# Altium PCB LANModule.PcbDoc
Units mm, origin at the board's own origin, x right, y up, seen from the top; angles counter-clockwise.
Board outline 82.35 x 57.25 mm, 2 copper layers (Top Layer, Bottom Layer), stack 1.671 mm thick; 19 components, 23 nets, 161 pads, 55 vias.
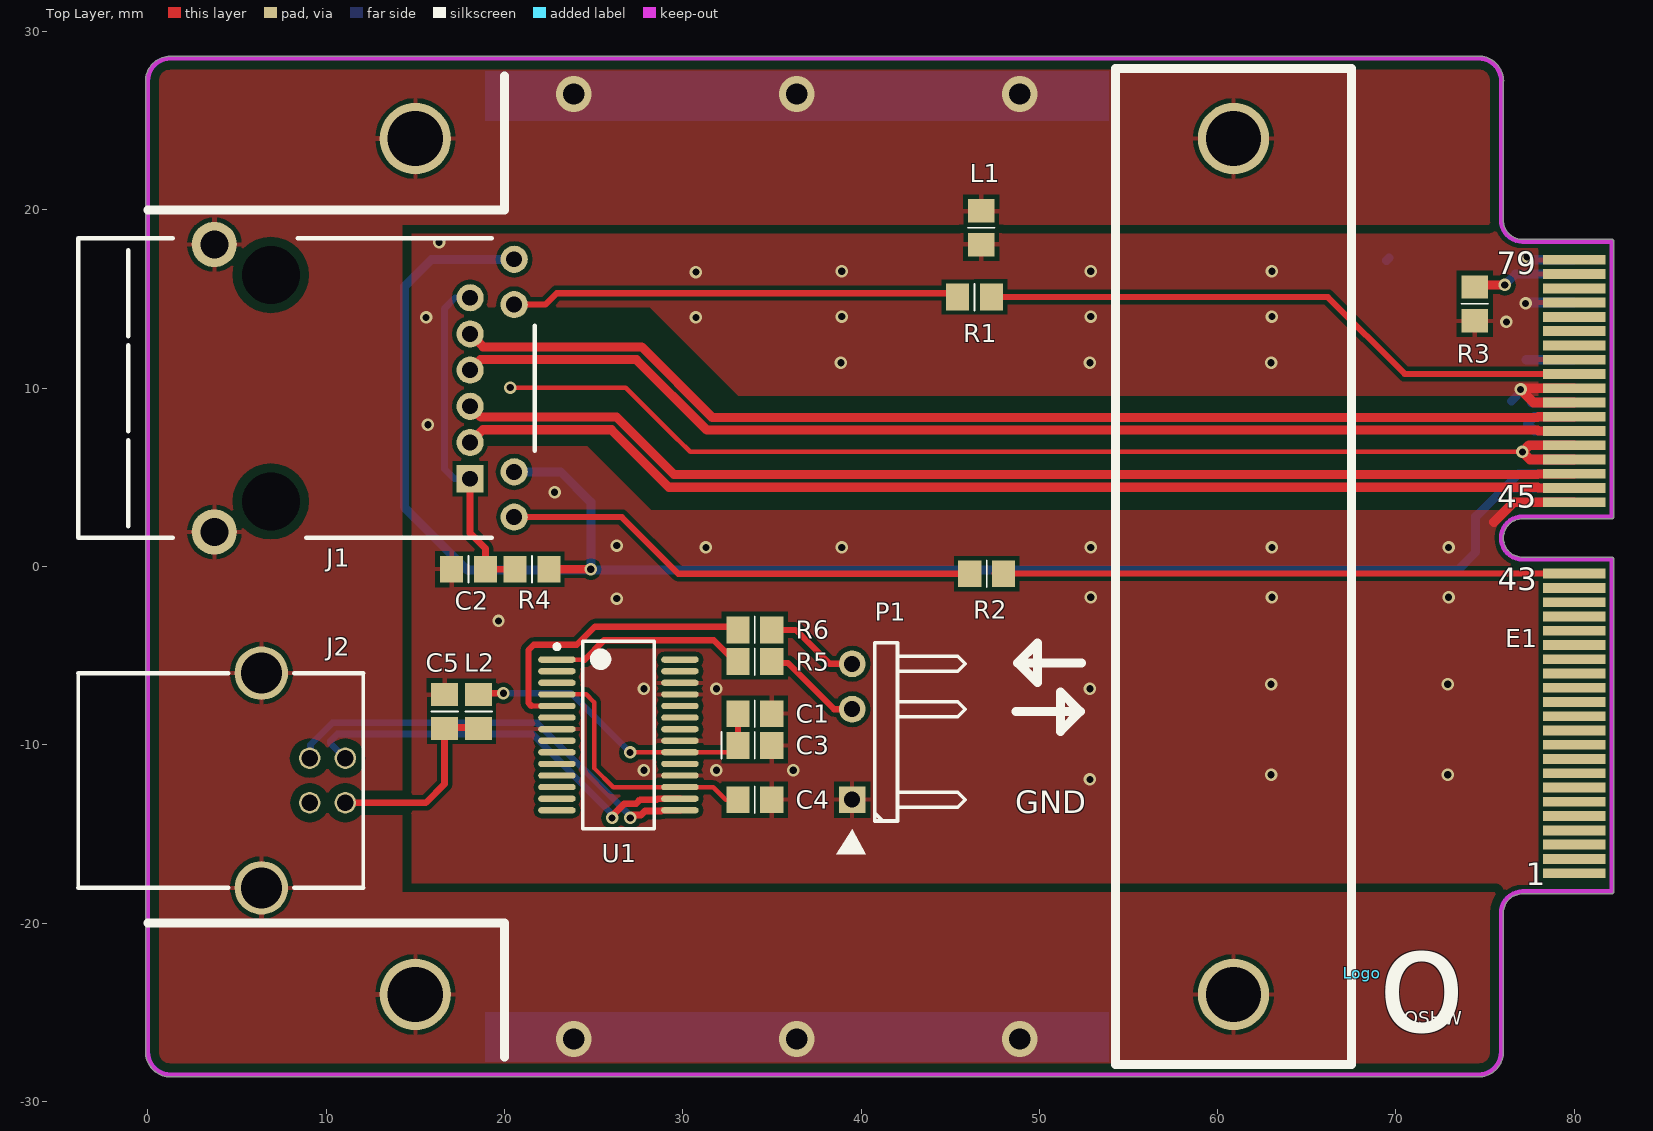
[diagram p0: Top Layer view]
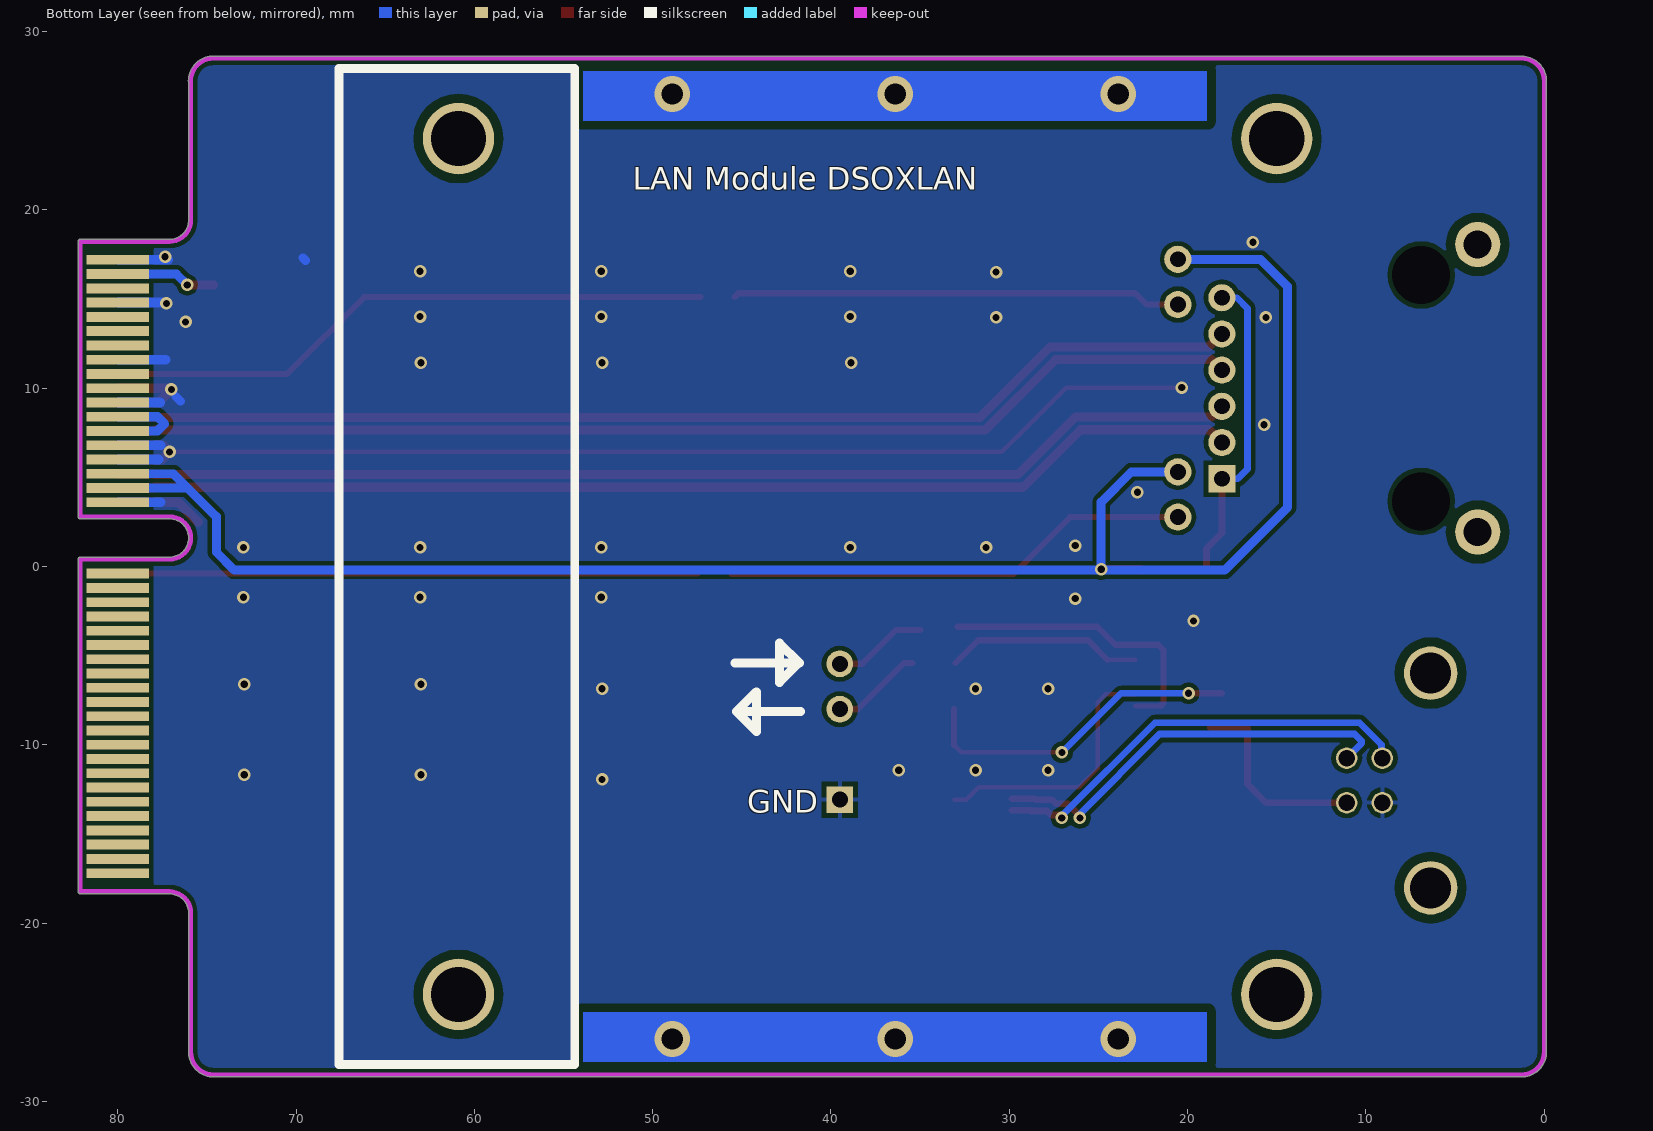
[diagram p1: Bottom Layer view, seen from below]
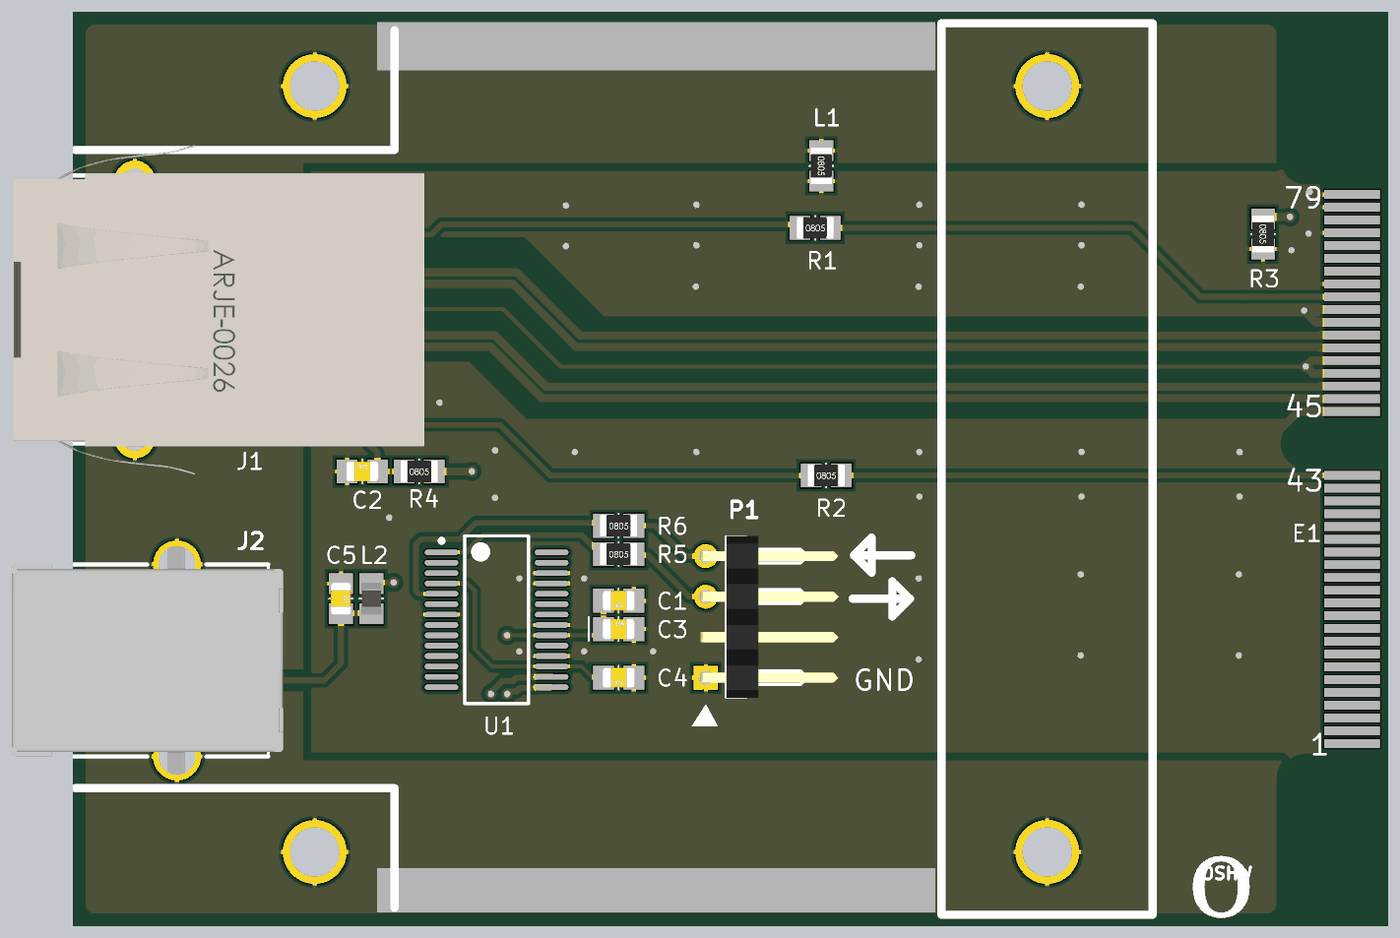
[diagram p2: 3D render of the assembled board from above, using the file's embedded part models]

## Layer stack, top to bottom
Top Solder: solder mask 0.0102, Solder Resist, Dk 3.5
Top Layer: signal copper 0.0356
Dielectric1: core 1.6, FR-4, Dk 4.8
Bottom Layer: signal copper 0.0356
Bottom Solder: solder mask 0.0102, Solder Resist, Dk 3.5

## Board outline
1.27,-28.627 74.632,-28.627 ccw(c74.632,-27.23) 76.015,-27.431 ccw(c75.9,-27.377) 76.027,-27.377 76.027,-27.311 ccw(c74.632,-27.23) 76.03,-27.23 ccw(c75.902,-27.23) 76.027,-27.205 76.027,-19.437 ccw(c75.9,-19.437) 76.024,-19.408 cw(c77.096,-19.437) 77.096,-18.364 ccw(c77.096,-18.237) 77.151,-18.352 82.1,-18.352 ccw(c82.1,-18.225) 82.227,-18.225 82.227,0.4 ccw(c82.1,0.4) 82.1,0.528 77.1,0.528 cw(c77.1,1.6) 77.099,2.673 cw(c77.1,1.6) 77.1,2.673 82.1,2.673 ccw(c82.1,2.8) 82.227,2.8 82.227,18.225 ccw(c82.1,18.225) 82.1,18.353 77.1,18.353 cw(c77.1,19.425) 76.027,19.425 76.027,27.18 ccw(c75.911,27.23) 76.038,27.23 ccw(c74.641,27.23) 74.641,28.628 ccw(c74.641,28.5) 74.637,28.628 ccw(c74.632,28.5) 74.632,28.628 1.27,28.628 ccw(c1.27,28.5) 1.253,28.627 ccw(c1.27,27.229) -0.127,27.229 -0.127,-27.23 ccw(c1.27,-27.23)

## Design rules (kind name [scope] priority, off if disabled: settings)
Clearance Clearance_EARTH [InNet('EARTH')] p1: gap=0.5
Clearance Clearance_Poly [All vs Inpoly] p2: gap=0.254
Clearance [All] p3: gap=0.127
DiffPairsRouting DiffPair_DiffPairsRouting [InDifferentialPair ('TXD') Or InDifferentialPair ('RXD')] p1: maxlimit=0.203 minlimit=0.203 mostfreqgap=0.203 toplayer_minwidth=0.508 toplayer_maxwidth=0.508 toplayer_prefwidth=0.508 bottomlayer_minwidth=0.508 bottomlayer_maxwidth=0.508 bottomlayer_prefwidth=0.508 maxuncoupledlength=12.7
DiffPairsRouting [All] p2: maxlimit=0.254 minlimit=0.254 mostfreqgap=0.254 toplayer_minwidth=0.381 toplayer_maxwidth=0.381 toplayer_prefwidth=0.381 bottomlayer_minwidth=0.381 bottomlayer_maxwidth=0.381 bottomlayer_prefwidth=0.381 maxuncoupledlength=12.7
HoleSize [All] p1: absolutevalues=TRUE maxlimit=4 minlimit=0.025 maxpercent=80.000 minpercent=20.000
MatchedLengths DiffPair_MatchedLengths [InDifferentialPair ('TXD') Or InDifferentialPair ('RXD')] p1: tolerance=5 checknetsindiffpair=TRUE checkdiffpairvsdiffpair=FALSE checkxsignals=FALSE checkothers=FALSE
MatchedLengths DiffPair_MatchedLengths_1 [InDifferentialPair ('RXD') Or InDifferentialPair ('TXD')] p2: tolerance=25.4 checknetsindiffpair=TRUE checkdiffpairvsdiffpair=FALSE checkxsignals=FALSE checkothers=FALSE
MatchedLengths DiffPair_MatchedLengths_2 [InDifferentialPair ('TXD') Or InDifferentialPair ('RXD')] p3: tolerance=25.4 checknetsindiffpair=TRUE checkdiffpairvsdiffpair=FALSE checkxsignals=FALSE checkothers=FALSE
MinimumSolderMaskSliver [All] p1: minsoldermaskwidth=0.025
PolygonConnect PolygonConnect_1 [All vs isVia] p1: connectstyle=Direct reliefconductorwidth=0.254 reliefentries=4 polygonreliefangle="90 Angle" airgapwidth=0.254
PolygonConnect [All] p2: connectstyle=Relief reliefconductorwidth=0.254 reliefentries=4 polygonreliefangle="90 Angle" airgapwidth=0.254
RoomDefinition LANModule [InComponentClass('LANModule')] p1: confinementstyle=ConfineIn formatcopy=TRUE lockcomponents=FALSE outline -5.205,-30.063 84.396,-30.063 84.396,30.237 -5.205,30.237
RoutingVias [All] p1: holewidth=0.711 width=1.27 viastyle="Through Hole" minholewidth=0.711 minwidth=1.27 maxholewidth=0.711 maxwidth=1.27
SilkToSolderMaskClearance SilkscreenOverComponentPads [IsPad] p1: minsilkscreentomaskgap=0.127 clearancetoexposedcopper=TRUE
SolderMaskExpansion [All] p1: expansion=0.102
Width DiffPair_Width [InDifferentialPair('TXD') Or InDifferentialPair('RXD')] p1: maxlimit=0.254 minlimit=0.254 preferedwidth=0.254 impedancedriven=TRUE minimp=50.000000 maximp=50.000000 favimp=50.000000
Width [All] p2: maxlimit=1.016 minlimit=0.254 preferedwidth=0.508
26 further rules are at their usual default settings.

## Classes and differential pairs
component class LANModule: C1 C2 C3 C4 C5 E1 J1 J2 L1 L2 Logo P1 R1 R2 R3 R4 R5 R6
differential pair RXD: +RXD_P -RXD_N
differential pair TXD: +TXD_P -TXD_N
differential pair D: +D_P -D_N

## Components (designator, comment, footprint, x,y, rotation, side; value= is the part's Value field where it differs from the comment)
C1 "10nF" CCNP2012-0805 34.043,-8.255 r180 top
C2 "1uF" CCNP2012-0805 17.986,-0.152 r0 top
C3 "4u7F" CC2012-0805 34.043,-10.033 r0 top
C4 "100nF" CCNP2012-0805 34.043,-13.081 r180 top
C5 "10nF" CCNP2012-0805 16.644,-8.128 r270 top
E1 "DSO_LAN" DSO_LAN 80,0 r0 top locked
J1 "RJMG1-6312-81-01NR" "MAGJACK - AMPHENOL RJMG16" 6.896,10 r0 top
J2 "USB Type A Plug" USB_BCon 8.722,-12 r0 top
L1 "FB" CR2012-0805 46.743,19 r270 top
L2 "Ferrite Bead" FB2012-0805 18.549,-8.128 r90 top
Logo "OSHW Logo" OSHW 68.126,-22.809 r0 top
P1 "Header 1x4H" HDR1X4H 39.504,-13.081 r90 top
R1 "470R" CR2012-0805 46.362,15.113 r0 top
R2 "470R" CR2012-0805 47.048,-0.4 r0 top
R3 "0R" CR2012-0805 74.422,14.732 r270 top
R4 "10R" CR2012-0805 21.542,-0.152 r0 top
R5 "1K" CR2012-0805 34.043,-5.334 r0 top
R6 "1K" CR2012-0805 34.043,-3.556 r0 top
U1 "FT232RL-Reel" SSOP-28_N 26.393,-9.448 r0 top

## Footprints (in the part's own frame and the unit in brackets; to place one, negate y for a bottom-side part, rotate by r counter-clockwise, add the part's x,y. Pads: shape width x height; smd on the part's side, far side on the other; paste and mask are expansions set on the pad)
CC2012-0805 [mm]
  rect 1.3x1.5 smd: 1(-0.95,0) 2(0.95,0)
  silkscreen extent -1.87,-0.75 0,0.75, body extent -1,-0.62 1,0.63, height 0.78
CCNP2012-0805 [mm]
  rect 1.3x1.5 smd: 1(-0.95,0) 2(0.95,0)
  silkscreen extent 0,-0.75 0,0.75, body extent -1,-0.62 1,0.63, height 0.78
CR2012-0805 [mm]
  rect 1.3x1.5 smd: 1(-0.95,0) 2(0.95,0)
  silkscreen extent 0,-0.75 0,0.75, body extent -1.15,-0.67 1.15,0.68, height 0.76
DSO_LAN [mm]
  rect 3.5x0.55 smd: 1(0,-17.2) 3(0,-16.4) 5(0,-15.6) 7(0,-14.8) 9(0,-14) 11(0,-13.2) 13(0,-12.4) 15(0,-11.6) 17(0,-10.8) 19(0,-10) 21(0,-9.2) 23(0,-8.4) 25(0,-7.6) 27(0,-6.8) 29(0,-6) 31(0,-5.2) 33(0,-4.4) 35(0,-3.6) 37(0,-2.8) 39(0,-2) 41(0,-1.2) 43(0,-0.4) 45(0,3.6) 47(0,4.4) 49(0,5.2) 51(0,6) 53(0,6.8) 55(0,7.6) 57(0,8.4) 59(0,9.2) 61(0,10) 63(0,10.8) 65(0,11.6) 67(0,12.4) 69(0,13.2) 71(0,14) 73(0,14.8) 75(0,15.6) 77(0,16.4) 79(0,17.2)
  rect 3.5x0.55 smd far side: 2(0,-17.2) 4(0,-16.4) 6(0,-15.6) 8(0,-14.8) 10(0,-14) 12(0,-13.2) 14(0,-12.4) 16(0,-11.6) 18(0,-10.8) 20(0,-10) 22(0,-9.2) 24(0,-8.4) 26(0,-7.6) 28(0,-6.8) 30(0,-6) 32(0,-5.2) 34(0,-4.4) 36(0,-3.6) 38(0,-2.8) 40(0,-2) 42(0,-1.2) 44(0,-0.4) 46(0,3.6) 48(0,4.4) 50(0,5.2) 52(0,6) 54(0,6.8) 56(0,7.6) 58(0,8.4) 60(0,9.2) 62(0,10) 64(0,10.8) 66(0,11.6) 68(0,12.4) 70(0,13.2) 72(0,14) 74(0,14.8) 76(0,15.6) 78(0,16.4) 80(0,17.2)
  Keep-Out Layer lines w0.254: -78.73,28.499 ccw(c-78.73,27.229) -80,27.229 -80,-27.23 ccw(c-78.73,-27.23) -78.73,-28.5 -5.368,-28.5 ccw(c-5.368,-27.23) -4.098,-27.23 ; -78.73,28.5 -5.368,28.5 ; -5.359,28.5 cw(c-5.359,27.23) -4.089,27.23 ; -4.104,-19.437 cw(c-2.904,-19.437) -2.904,-18.237 ; -4.1,-27.377 -4.1,-19.437 ; -4.1,27.229 -4.1,19.425 ccw(c-2.9,19.425) -2.9,18.225 2.1,18.225 2.1,2.8 -2.9,2.8 ccw(c-2.9,1.6) -2.9,0.4 2.1,0.4 2.1,-18.225 -2.904,-18.225
FB2012-0805 [mm] "Ferrite Bead 0805"
  rect 1.3x1.5 smd: 1(-0.95,0) 2(0.95,0)
  silkscreen extent 0,-0.75 0,0.75, body extent -1,-0.62 1,0.63, height 0.85
HDR1X4H [mm] "Connector; Header; 4 Position; Right Angle"
  rect 1.5x1.5 hole 0.9: 1(0,0)
  round 1.5 hole 0.9: 3(5.08,0) 4(7.62,0)
  silkscreen extent -3.05,-6.35 8.81,0.89, body extent -1.27,-8.3 8.89,0.33, height 2.54
"MAGJACK - AMPHENOL RJMG16" [mm] "RJ45 Jack with Magnetics"
  round 2.54 hole 3.25: 0(0,-6.35) 0(0,6.35)
  rect 1.524x1.524 hole 0.89: 1(11.18,-5.075)
  round 1.524 hole 0.89: 2(11.18,-3.045) 3(11.18,-1.015) 4(11.18,1.015) 5(11.18,3.045) 6(11.18,5.075) G-A(13.65,7.23) G-K(13.65,4.69) Y-A(13.65,-4.69) Y-K(13.65,-7.23)
  round 2.54 hole 1.575: S1(-3.17,8.065) S2(-3.17,-8.065)
  silkscreen extent -10.79,-8.4 14.8,8.4, body extent -10.79,-10.36 14.99,10.31, height 16.16
OSHW [mm] "OSHW Logo"
SSOP-28_N [mm] "SOP, 28-Leads, Body 10.2x5.3mm, Pitch 0.65mm, IPC Medium Density"
  oval 2.1x0.35 smd: 1(-3.45,4.225) 2(-3.45,3.575) 3(-3.45,2.925) 4(-3.45,2.275) 5(-3.45,1.625) 6(-3.45,0.975) 7(-3.45,0.325) 8(-3.45,-0.325) 9(-3.45,-0.975) 10(-3.45,-1.625) 11(-3.45,-2.275) 12(-3.45,-2.925) 13(-3.45,-3.575) 14(-3.45,-4.225) 15(3.45,-4.225) 16(3.45,-3.575) 17(3.45,-2.925) 18(3.45,-2.275) 19(3.45,-1.625) 20(3.45,-0.975) 21(3.45,-0.325) 22(3.45,0.325) 23(3.45,0.975) 24(3.45,1.625) 25(3.45,2.275) 26(3.45,2.925) 27(3.45,3.575) 28(3.45,4.225)
  silkscreen extent -3.57,-5.25 2,5.25, body extent -2.8,-5.25 2.8,5.25, height 2
USB_BCon [mm] "USB B-type Connector"
  round 1.2 hole 0.92: 5V(2.355,-1.25) D+(0.355,1.25) D-(2.355,1.25) Gnd(0.355,-1.25)
  round 3 hole 2.3: Shield1(-2.355,6.02) Shield2(-2.355,-6.02)
  silkscreen extent -12.63,-6.02 3.37,6.02, body extent -12.7,-7.43 4.3,7.43, height 11

## Part data
C1 C2 C4 C5: library part Cap, "Capacitor"
C3: library part "Cap Polar", "Polarized Capacitor"
J1: library part MagJack-RJMG1-6312-81-01NR, "RJ45 Jack with Magnetics (Amphenol)"
J2: library part USB_TYPE_A_PLUG, "MOLEX 48037-1000"
L1: library part "Ferrite Bead 0805", "Ferrite Bead (0805) 0.045OHM, 2A"
L2: library part "Ferrite Bead 0805", "Ferrite Bead SMT 0805, TDK MPZ2012S102AT, 0.15OHM, 1.5A"
P1: "Header, 4-Pin, Right Angle"
R1 R2 R3 R4: library part Res_CR0805, "Resistor"
R5 R6: library part Res, "Resistor"
U1: "USB UART Asynchronous Serial Data Transfer Chip, SSOP-28, Tape and Reel"

## Free pads (board coordinates)
  round 4 hole 3.1: 0(15,24) 1(60.896,24) 2(60.896,-24) 3(15,-24)

## Via types
v1: diameter 0.7, hole 0.4, Top Layer to Bottom Layer, tented both sides, 49 vias
v2: diameter 2, hole 1.2, Top Layer to Bottom Layer, tented both sides, 6 vias

## Nets (pads, with @x,y where several pads share a name; then routed paths per layer and width w, separated by ;. In a path a pad name is that pad's centre, name@x,y a point inside that pad or via, vN(x,y) a via of type N, cw(c..) or ccw(c..) an arc to the next point about the centre after c; other vN are vias at no path point)
3V3: E1.48 E1.50 J1.G-A J1.Y-A R4.2 | length 104.6
  Top Layer w0.5: R4.2@22.548,-0.2 22.596,-0.152 v1(24.844,-0.152)
  Bottom Layer w0.5: J1.Y-A 23.145,5.31 24.844,3.612 v1(24.844,-0.152) ; J1.G-A 15.916,17.23 14.384,15.698 14.384,3.328 17.914,-0.203 73.46,-0.203 74.476,0.813 74.476,2.796 76.08,4.4 ; E1.48 76.08,4.4 ; E1.50 76.88,5.201 76.08,4.4
5V: C5.2 J2.5V L2.1 | length 11.2
  Top Layer w0.381: J2.5V 15.592,-13.25 16.644,-12.197 C5.2 ; C5.2@16.691,-9.026 L2.1@18.723,-9.026
D_N: J2.D- U1.16 | length 23.8
  Top Layer w0.381: v1@25.935,-14.097 v1(26.042,-14.097) 26.042,-13.989 26.729,-13.302 27.393,-13.302 27.615,-13.081 28.545,-13.081 28.603,-13.023 U1.16
  Bottom Layer w0.381: J2.D- 10.243,-9.916 10.243,-9.779 10.624,-9.398 21.569,-9.398 26.042,-13.871 v1(26.042,-14.097)
D_P: J2.D+ U1.15 | length 23.9
  Top Layer w0.381: v1(27.058,-14.097) 27.218,-13.937 27.656,-13.937 27.878,-13.716 28.808,-13.716 28.851,-13.673 U1.15
  Bottom Layer w0.381: J2.D+@9.126,-10.179 9.126,-9.998 10.361,-8.763 21.832,-8.763 27.058,-13.989 v1(27.058,-14.097)
EARTH: J1.S1 J1.S2 J2.Shield1 J2.Shield2 L1.1 pad.0 pad.1 pad.2 pad.3
  other v2: 23.896,-26.5 36.396,-26.5 48.896,-26.5 23.896,26.5 36.396,26.5 48.896,26.5
GND: C1.1 C2.1 C3.2 C4.1 C5.1 E1.45 E1.46 E1.51 E1.52 E1.53 E1.54 E1.59 E1.60 E1.61 E1.65 E1.66 E1.73 E1.74 E1.77 E1.79 E1.80 J2.Gnd L1.2 P1.1 R3.2 U1.7 U1.18 U1.21 U1.25 U1.26 | length 94
  Top Layer w0.254: v1(20.327,10.033) 26.804,10.033 29.73,7.108 29.735,7.112 30.421,6.427 v1(77.096,6.427)
  Top Layer w0.55: 75.496,2.49 76.607,3.6 E1.45 ; E1.51 77.522,6 v1(77.096,6.427) 77.47,6.8 E1.53 ; E1.59 77.726,9.2 v1(76.995,9.932) 77.063,10 E1.61
  Bottom Layer w0.5: 69.476,17.171 69.624,17.319 ; 76.484,9.27 76.749,9.535
  Bottom Layer w0.55: v1@77.177,17.2 E1.80 ; v1(77.274,14.758) 77.317,14.8 E1.74 ; 77.317,11.601 E1.66 ; 77.586,6.8 E1.54 ; 77.597,3.6 E1.46 ; 77.624,9.2 E1.60 ; 77.711,6 E1.52
  other v1: 52.839,-11.938 62.999,-11.684 72.905,-11.684 27.82,-11.43 31.884,-11.43 36.202,-11.43 27.82,-6.858 31.884,-6.858 52.839,-6.858 62.999,-6.604 72.905,-6.604 19.667,-3.048 26.296,-1.803 52.886,-1.727 63.046,-1.727 72.952,-1.727 31.296,1.067 38.916,1.067 52.886,1.067 63.046,1.067 72.952,1.067 26.296,1.169 22.816,4.166 15.704,7.951 38.869,11.43 52.839,11.43 62.999,11.43 76.2,13.716 15.603,13.97 30.741,13.97 38.916,14.021 52.886,14.021 63.046,14.021 30.741,16.51 38.916,16.561 52.886,16.561 63.046,16.561 77.35,17.374 16.339,18.187
LAN_DETECT: E1.78 R3.1 | length 5.6
  Top Layer w0.5: R3.1@74.643,15.799 v1(76.106,15.799)
  Bottom Layer w0.5: v1(76.106,15.799) 76.707,16.4 E1.78
LED_GREEN: E1.43 R2.2 | length 32.5
  Top Layer w0.35: R2.2@47.485,-0.4 R2.2 E1.43
LED_GREEN_R: J1.Y-K R2.1 | length 26.4
  Top Layer w0.35: J1.Y-K 26.574,2.77 29.751,-0.406 R2.1@45.585,-0.406
LED_YELLOW: E1.63 R1.2 | length 34.5
  Top Layer w0.35: R1.2 66.174,15.113 70.487,10.8 E1.63
LED_YELLOW_R: J1.G-K R1.1 | length 25.2
  Top Layer w0.35: J1.G-K 22.292,14.69 22.931,15.329 45.196,15.329 R1.1
NetE1_56: E1.56 E1.58 | length 5.6
  Bottom Layer w0.508: E1.56 77.777,7.601 77.376,8.001 77.775,8.4 E1.58
RXCT: C2.2 J1.1 J1.6 R4.1 | length 19.4
  Top Layer w0.35: C2.2 R4.1
  Top Layer w0.381: J1.1 18.076,1.87 18.936,1.011 C2.2
  Bottom Layer w0.381: J1.1 17.18,4.925 16.644,5.461 16.644,14.478 17.241,15.075 J1.6
RXD: R6.1 U1.5 | length 16.7
  Top Layer w0.254: 21.517,-7.823 U1.5
  Top Layer w0.35: 21.517,-7.823 21.343,-7.649 21.343,-4.699 21.648,-4.394 24.061,-4.394 25.077,-3.378 R6.1@32.9,-3.378
RXD_N: E1.57 J1.5 | length 63.9
  Top Layer w0.508: J1.5 18.802,12.319 27.693,12.319 31.656,8.357 77.953,8.357 77.996,8.4 E1.57
RXD_P: E1.55 J1.4 | length 63.8
  Top Layer w0.508: J1.4 18.669,11.608 27.399,11.608 31.361,7.646 77.951,7.646 77.996,7.601 E1.55
RXDR: P1.4 R6.2 | length 5.3
  Top Layer w0.35: R6.2 36.329,-3.556 38.234,-5.461 P1.4
TXD: R5.1 U1.1 | length 11
  Top Layer w0.254: U1.1 24.502,-5.223
  Top Layer w0.35: 24.502,-5.223 25.585,-4.14 31.743,-4.14 R5.1@33.013,-5.41
TXD_N: E1.49 J1.3 | length 63.5
  Top Layer w0.508: J1.3 18.679,8.382 26.296,8.382 29.523,5.156 77.952,5.156 77.996,5.201 E1.49
TXD_P: E1.47 J1.2 | length 63.6
  Top Layer w0.508: J1.2 18.792,7.671 26.002,7.671 29.228,4.445 77.952,4.445 77.996,4.4 E1.47
TXDR: P1.3 R5.2 | length 5.2
  Top Layer w0.35: R5.2@35.421,-5.41 35.897,-5.41 38.488,-8.001 P1.3
VCC: C1.2 C3.1 L2.2 U1.20 | length 18.6
  Top Layer w0.254: v1(27.044,-10.423) U1.20 32.703,-10.423 C3.1
  Top Layer w0.35: L2.2@18.088,-7.112 v1(19.946,-7.112) ; C3.1 C1.2 C1.2@33.093,-8.001
  Bottom Layer w0.35: v1(19.946,-7.112) 23.732,-7.112 v1(27.044,-10.423)
VCCIO: C4.2 U1.4 U1.17 | length 14.8
  Top Layer w0.254: U1.4 24.58,-7.173 25.026,-7.62 25.026,-11.303 26.097,-12.373 U1.17 31.707,-12.373 32.414,-13.081 C4.2
pads on no net: E1.1 E1.2 E1.3 E1.4 E1.5 E1.6 E1.7 E1.8 E1.9 E1.10 E1.11 E1.12 E1.13 E1.14 E1.15 E1.16 E1.17 E1.18 E1.19 E1.20 E1.21 E1.22 E1.23 E1.24 E1.25 E1.26 E1.27 E1.28 E1.29 E1.30 E1.31 E1.32 E1.33 E1.34 E1.35 E1.36 E1.37 E1.38 E1.39 E1.40 E1.41 E1.42 E1.44 E1.62 E1.64 E1.67 E1.68 E1.69 E1.70 E1.71 E1.72 E1.75 E1.76 J1.0 U1.2 U1.3 U1.6 U1.8 U1.9 U1.10 U1.11 U1.12 U1.13 U1.14 U1.19 U1.22 U1.23 U1.24 U1.27 U1.28

## Polygon pours and split planes (outlines as drawn)
GND on Top Layer "g" (solid, remove dead copper, pour order 18): 13.596,19.203 78.239,19.203 78.239,9.576 33.103,9.576 28.138,14.542 13.596,14.542
EARTH on Top Layer "Top Layer-No Net" (solid, remove dead copper, pour order 10): -2.863,26.807 14.278,26.807 14.278,-25.033 -2.739,-25.033 -2.863,-24.53 -2.863,26.641 -2.905,26.807
EARTH on Top Layer "Top Layer-No Net" (solid, remove dead copper, pour order 14): -1.632,29.1 76.728,29.1 76.647,28.99 76.647,19.177 -1.423,19.177 -1.632,19.461
EARTH on Top Layer "Top Layer-No Net" (solid, remove dead copper, pour order 13): 0.054,-18.263 76.762,-18.263 76.762,-29.963 0.054,-29.963
GND on Top Layer "Top-Gnd" (solid, remove dead copper, pour order 16): 13.516,15.748 18.092,15.748 18.092,6.732 24.641,6.731 28.222,3.15 78.874,3.15 78.874,-19.253 13.516,-19.253
GND on Bottom Layer "Bottom-Gnd" (solid, remove dead copper, pour order 12): -1.034,28.829 78.62,28.83 78.62,-29.972 -1.034,-29.972

## Other copper
Bottom Layer:
  rectangle net EARTH: 18.896,25 53.896,27.8
  rectangle net EARTH: 18.896,-27.8 53.896,-25

## Silkscreen, mask and mechanical layers (free items; w line width, h text height)
Top Overlay:
  lines w0.5: 0,-20 20,-20 20,-27.5 ; 0,20 20,20 20,27.5 ; 48.699,-8.128 52.306,-8.128 51.188,-9.245 51.188,-7.035 52.28,-8.128 ; 48.801,-5.41 49.893,-6.502 49.893,-4.292 48.775,-5.41 52.382,-5.41 ; 54.268,-27.94 67.5,-27.94 67.5,27.94 54.268,27.94 54.268,-27.94
  text "79" at 75.648,16.383 h1.27
  text "45" at 75.674,3.302 h1.27
  text "43" at 75.699,-1.346 h1.27
  text "GND" at 48.648,-13.843 h1.27
  text "1" at 77.274,-17.881 h1.27
Bottom Overlay:
  lines w0.5: 41.699,-8.128 45.306,-8.128 44.188,-9.245 44.188,-7.035 45.28,-8.128 ; 41.801,-5.41 42.893,-6.502 42.893,-4.292 41.775,-5.41 45.382,-5.41 ; 54.371,-27.94 54.371,27.94 67.604,27.94 67.604,-27.94 54.371,-27.94
  text "LAN Module DSOXLAN" at 51.108,21.133 h1.27
  text "GND" at 44.7,-13.8 h1.27
Top Paste:
  rectangle: 18.896,-27.8 53.896,-25
  rectangle: 18.896,25 53.896,28
Bottom Paste:
  rectangle: 18.896,-27.8 53.896,-25
  rectangle: 18.896,25 53.896,27.8
Top Solder:
  rectangle: 18.896,-27.8 53.896,-25
  rectangle: 18.896,25 53.896,28
Bottom Solder:
  rectangle: 18.896,25 53.896,27.8
  rectangle: 18.896,-27.8 53.896,-25
Mechanical 1:
  lines w0.254: -0.104,0 82.896,0
Mechanical 2:
  lines w1.6: 76.715,29.287 76.715,19.025 82.811,19.025 ; 76.741,-29.184 76.741,-19.05 82.837,-19.05 ; 76.918,1.931 82.684,1.931 ; 76.969,1.27 82.735,1.27 ; -0.806,-29.286 -0.806,29.287 82.887,29.287 82.887,-29.286 -0.806,-29.286

## Dimensions
15,24 to 0,27.229 on Mechanical 1
82.1,18.962 to 0,27.229 on Mechanical 1
74.632,28.5 to 74.632,-28.5 on Mechanical 1
15,-24 to 60.896,-24 on Mechanical 1
3.726,18.065 to -0.104,0 on Mechanical 1
3.726,1.935 to -0.104,0 on Mechanical 1
15,24 to -0.104,0 on Mechanical 1
-0.104,0 to 15,-24 on Mechanical 1
-0.104,0 to 6.367,-18.019 on Mechanical 1
-0.104,0 to 6.367,-5.98 on Mechanical 1

## Text inside footprints (layer, text, board x,y; h text height)
Logo: Top Overlay "o" at 73.942,-28.041 h10.16; Top Overlay "OSHW" at 70.435,-25.709 h0.76